# Altium PCB WCH_hairDrierCore_V1.5.PcbDoc (part 3 of 7)
Units mil, origin at the board's own origin, x right, y up, seen from the top; angles counter-clockwise.
Board outline 1683.54 x 992.13 mil, 4 copper layers (Top Layer, Mid-Layer 1, Mid-Layer 2, Bottom Layer); 84 components, 65 nets, 249 pads, 160 vias.
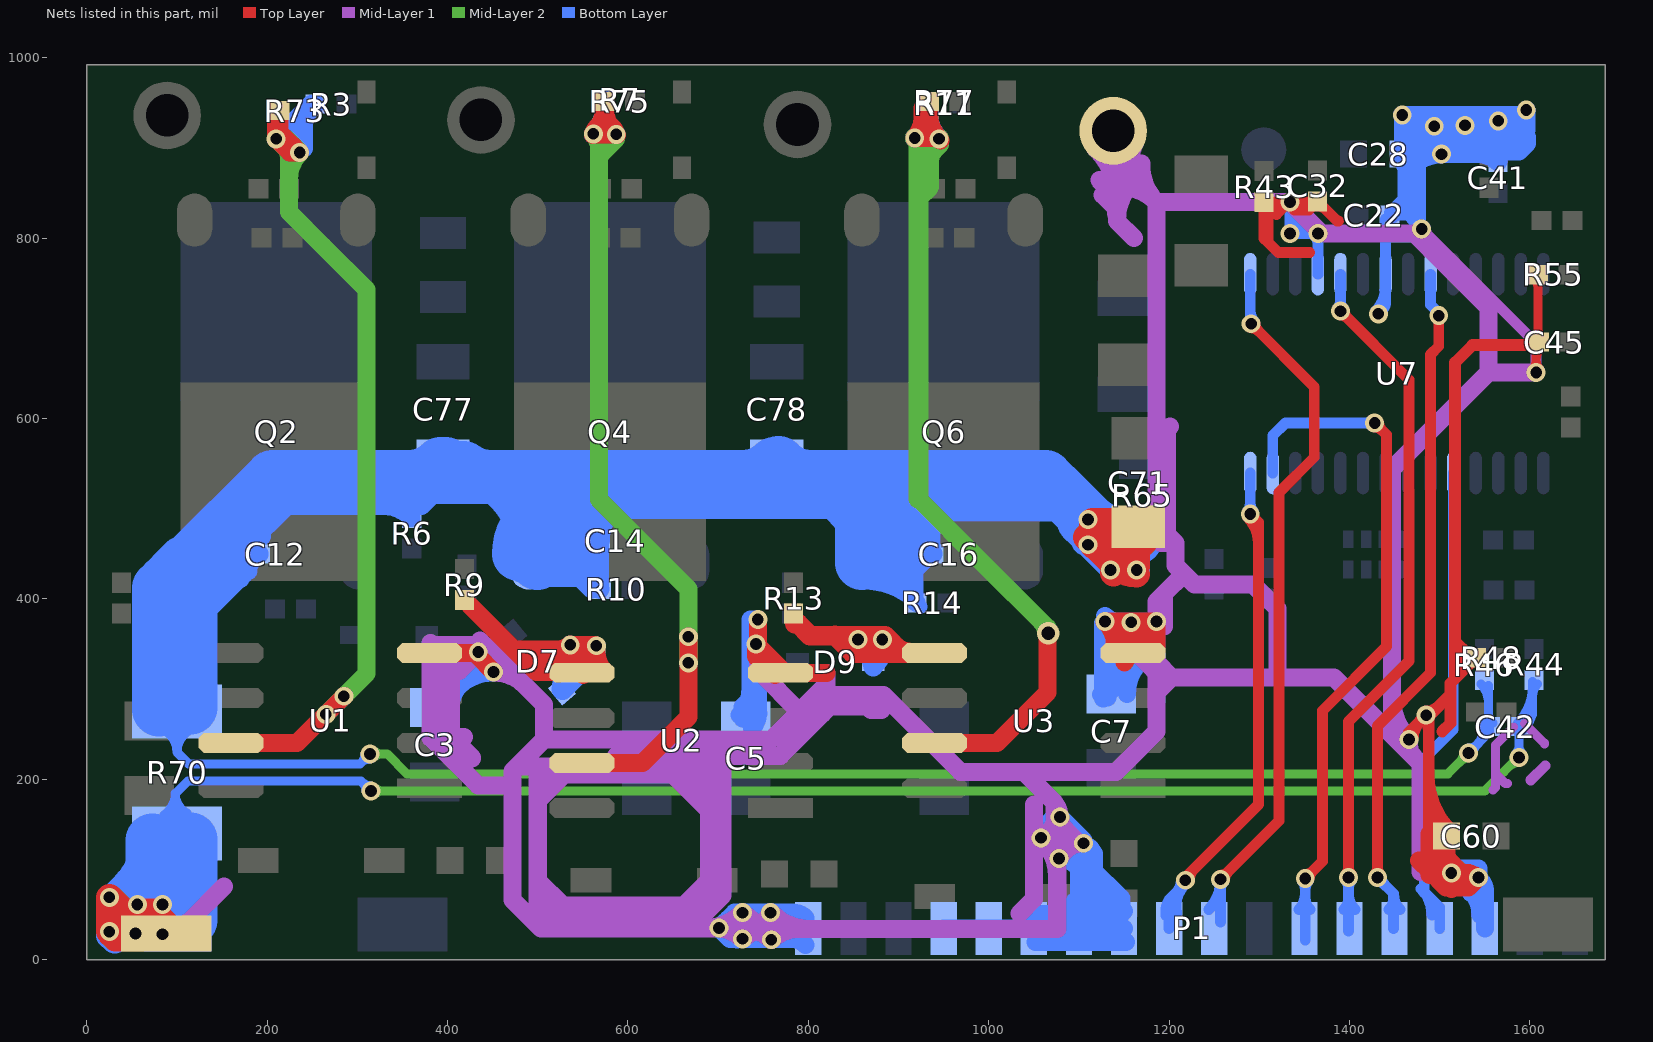
[diagram p5: the nets of this part, all layers, seen from the top]

## Via types
v1: diameter 21, hole 13, Top Layer to Bottom Layer, tented both sides, 155 vias
v2: diameter 25, hole 15, Top Layer to Bottom Layer, tented both sides, 5 vias

## Nets (pads, with @x,y where several pads share a name; then routed paths per layer and width w, separated by ;. In a path a pad name is that pad's centre, name@x,y a point inside that pad or via, vN(x,y) a via of type N, cw(c..) or ccw(c..) an arc to the next point about the centre after c; other vN are vias at no path point) (continued)
GND: (continued)
  Bottom Layer w20: C3.2@383.31,279.4 cw(c414.46,279.4) 392.43,301.43 ; C3.2@387,278 C3.2@399,290 ; C3.2@387,296 402,311 ; C3.2@391.65,291.06 ccw(c391.65,311.34) C3.2@406,297 ; C3.2@399,271.5 C3.2@399,290 ; 413.85,304.85 ccw(c439.29,279.4) 403.31,279.4 cw(c482.75,279.4) v1@426.57,335.57 ; 420,322 431,322 ; C5.2@724.98,272.07 ccw(c717.49,289) 736,289 736,377 v1(744,377) 744,362 ; C5.2@727,267.5 727,280 742,295 ; C5.2@734,264 744,274 744,362 ; 736,290.96 cw(c710.1,290.96) C5.2@728.41,272.64 ; 736,294.11 ccw(c766.37,294.11) C5.2@744.89,272.64 ; 736,301.3 cw(c693.2,301.3) 723.46,271.04 ccw(c673.89,320.61) 744,320.61 ; C5.2@737.61,256.89 ccw(c722.17,272.33) C5.2@744,272.33 ; C5.2@742,272.5 742,295 ; 742,305.44 cw(c695.61,305.44) C5.2@728.41,272.64 ; v1@742,348 v1(742,350) 742,321 742,295 ; 744,310.27 cw(c690.78,310.27) C5.2@728.41,272.64 ; v1@744,350 744,362 ; 782.65,52 v1(727,52) 718,52 v1(701,35) ; P1.18@788.43,23 v1(727,23) ; P1.15@950.04,34.61 1083,34.61 P1.12@1100.04,34.61 1100.04,115 ; P1.13@1047.04,50.61 1147.04,50.61 1147.04,68 1116.52,98.52 ; P1.13@1050.04,34.61 P1.11@1150.04,34.61 ; v1@1051,128 1051,136 1076,161 v1(1079,158) ; P1.13@1052.04,19.61 P1.11@1152.04,19.61 ; v1(1058,135) 1058,137 1069,148 ; 1088,129 1069,148 ; 1127,329.4 ccw(c1164.84,329.4) C7.2@1138.08,302.64 ; v1@1127,373 C7.2@1127,312 ; v1(1129,375) 1130,374 1144,374 ; v1@1129,381 ccw(c1148.59,400.59) v1@1157.83,374.47 ; v1@1132,372 1167,372 1167,358 ; C7.2@1133.41,302.64 ccw(c1110.27,325.79) 1143,325.79 ; 1134,50.61 1100,84.61 1100,102 ; v1@1136,374 1154,356 ; 1143,319.29 ccw(c1166.54,319.29) C7.2@1149.89,302.64 ; 1143,363.63 1143,328 ; 1143.22,344.22 1184.63,344.22 ; P1.11@1147.04,54.96 1100,102 ; C7.2@1148,311 1181.22,344.22 1184.63,344.22 ; C7.2@1153.31,294.4 cw(c1206.19,294.4) 1168.8,331.8 ; 1180,362 v1@1186,368 ; v1@1184.63,373.63 1184.63,344.22 ; v1@1185,374 v1(1158,374) 1144,374 ; v1(1186,375) v1@1186,368 ; v1(1458.5,936.5) 1554.5,936.5 ; v1@1459.5,936.5 C28.2@1459.5,893 ; 1461.5,918 1573,918 1554.5,936.5 ; v1@1520,96 1532,96 ; v1(1543,91) 1543,101 v1@1518,101 ; C41.2@1555.84,893 C28.2@1459.5,893 ; C41.2@1564.63,884.21 1564.63,899.63 1577,912 1586,912 ; 1564.63,896 1588,896 1597,905 1597,912 1586,912 ; v1(1565,930) 1584,930 v1(1596,942) ; 1593,917 1596,920 v1(1596,942) ; C3.2@399,290 431,322 ; 402,311 ccw(c414.85,298.15) 400.72,286.73 cw(c414.85,298.15) 402,311 ; 402,311 432,341 451,322 431,322 ; 410.88,301.88 cw(c451,261.77) v1@451,318.5 ; 410.88,301.88 cw(c451,261.77) v1@451,318.5 ; 410.88,301.88 cw(c451,261.77) v1@451,318.5 ; 419.5,310.5 cw(c441.95,288.06) v1@450.86,318.52 ; 419.5,310.5 cw(c441.95,288.06) v1@450.86,318.52 ; 419.5,310.5 cw(c441.95,288.06) v1@450.86,318.52 ; 421.83,312.83 ccw(c393.67,341) v1@433.5,341 ; 421.83,312.83 ccw(c393.67,341) v1@433.5,341 ; 421.83,312.83 ccw(c393.67,341) v1@433.5,341 ; v1(701,35) cw(c701,2.21) v1@726.61,22.69 ; v1(701,35) ccw(c701,62.56) v1@726.54,52.19 ; v1(701,35) cw(c701,2.21) v1@726.61,22.69 ; v1(701,35) ccw(c701,62.56) v1@726.54,52.19 ; v1(701,35) cw(c701,2.21) v1@726.61,22.69 ; v1(701,35) ccw(c701,62.56) v1@726.54,52.19 ; v1(701,35) 745.61,35 ; v1(701,35) 713,23 v1(727,23) ; v1@701.39,35.31 ccw(c727,55.79) v1(727,23) ; v1@701.39,35.31 ccw(c727,55.79) v1(727,23) ; v1@701.39,35.31 ccw(c727,55.79) v1(727,23) ; v1@708,28 ccw(c721.11,41.11) v1@726.85,23.48 ; v1@708,28 ccw(c721.11,41.11) v1@726.85,23.48 ; v1@708,28 ccw(c721.11,41.11) v1@726.85,23.48 ; 710.78,44.78 cw(c727,28.57) v1@727,51.5 ; 710.78,44.78 cw(c727,28.57) v1@727,51.5 ; 710.78,44.78 cw(c727,28.57) v1@727,51.5 ; 726.41,35 cw(c726.41,-10.59) v1@758.65,21.65 ; 726.41,35 cw(c726.41,-10.59) v1@758.65,21.65 ; 726.41,35 cw(c726.41,-10.59) v1@758.65,21.65 ; v1@727.35,22.65 cw(c756.23,-6.23) 756.23,34.61 ; v1@727.35,22.65 cw(c756.23,-6.23) 756.23,34.61 ; v1@727.35,22.65 cw(c756.23,-6.23) 756.23,34.61 ; v1@727.35,52.35 ccw(c770.19,95.19) 770.19,34.61 ; v1@727.35,52.35 ccw(c770.19,95.19) 770.19,34.61 ; v1@727.35,52.35 ccw(c770.19,95.19) 770.19,34.61 ; v1@727.46,22.81 cw(c745.61,15.4) 745.61,35 ; v1@727.46,22.81 cw(c745.61,15.4) 745.61,35 ; v1@727.46,22.81 cw(c745.61,15.4) 745.61,35 ; v1@727.5,52.03 ccw(c745.61,53.14) 745.61,35 ; v1@727.5,52.03 ccw(c745.61,53.14) 745.61,35 ; v1@727.5,52.03 ccw(c745.61,53.14) 745.61,35 ; 732,34.61 cw(c732,0.75) v1@758.61,21.69 ; 732,34.61 ccw(c732,61.94) v1@757.53,52.18 ; 732,34.61 cw(c732,0.75) v1@758.61,21.69 ; 732,34.61 ccw(c732,61.94) v1@757.53,52.18 ; 732,34.61 cw(c732,0.75) v1@758.61,21.69 ; 732,34.61 ccw(c732,61.94) v1@757.53,52.18 ; 732,34.61 P1.18@800.04,34.61 ; 742,295 cw(c717.62,295) 730.5,274.3 ccw(c717.62,295) 742,295 ; 742,295 cw(c718.1,295) 725.46,272.26 ccw(c718.1,295) 742,295 ; 742,295 ccw(c766.43,270.57) 731.98,267.89 cw(c766.43,270.57) 742,295 ; v1@758.36,52.35 ccw(c800.04,92.44) P1.18@800.04,34.61 ; v1@758.36,52.35 ccw(c800.04,92.44) P1.18@800.04,34.61 ; v1@758.36,52.35 ccw(c800.04,92.44) P1.18@800.04,34.61 ; v1@759.35,21.65 cw(c790.65,-9.65) P1.18@790.65,34.61 ; v1@759.35,21.65 cw(c790.65,-9.65) P1.18@790.65,34.61 ; v1@759.35,21.65 cw(c790.65,-9.65) P1.18@790.65,34.61 ; 780.92,23 cw(c780.92,0.53) P1.18@796.81,16.42 ; 780.92,23 cw(c780.92,0.53) P1.18@796.81,16.42 ; 780.92,23 cw(c780.92,0.53) P1.18@796.81,16.42 ; 783.14,52 cw(c783.14,32.67) P1.18@796.81,46.34 ; 783.14,52 cw(c783.14,32.67) P1.18@796.81,46.34 ; 783.14,52 cw(c783.14,32.67) P1.18@796.81,46.34 ; v1@1058,134.5 cw(c1058,111.57) 1074.22,127.78 ; v1@1058,134.5 cw(c1058,111.57) 1074.22,127.78 ; v1@1058,134.5 cw(c1058,111.57) 1074.22,127.78 ; v1@1058,134.5 cw(c1058,111.57) 1074.22,127.78 ; v1@1058,134.5 cw(c1058,111.57) 1074.22,127.78 ; v1@1058,134.5 cw(c1058,111.57) 1074.22,127.78 ; v1@1058.36,135.34 ccw(c1073,149.06) 1073,129 ; v1@1058.35,135.35 ccw(c1073.69,150.69) 1073.69,129 ; v1@1058.36,135.34 ccw(c1073,149.06) 1073,129 ; v1@1058.35,135.35 ccw(c1073.69,150.69) 1073.69,129 ; v1@1058.35,135.35 ccw(c1073.69,150.69) 1073.69,129 ; v1@1058.36,135.34 ccw(c1073,149.06) 1073,129 ; v1@1058.5,135 cw(c1079.02,135) 1064.51,149.51 ; v1@1058.5,135 cw(c1079.02,135) 1064.51,149.51 ; v1@1058.5,135 cw(c1079.02,135) 1064.51,149.51 ; 1067.9,152.9 cw(c1079,141.81) v1@1079,157.5 ; 1067.9,152.9 cw(c1079,141.81) v1@1079,157.5 ; 1067.9,152.9 cw(c1079,141.81) v1@1079,157.5 ; 1068.66,133.34 cw(c1047.32,112) v1@1077.5,112 ; 1068.66,133.34 cw(c1047.32,112) v1@1077.5,112 ; 1068.66,133.34 cw(c1047.32,112) v1@1077.5,112 ; 1069,148 v1(1079,158) ; 1073,129 1100,102 ; 1073,129 v1@1100.04,129 ; 1077.5,139.5 ccw(c1101.96,163.96) v1@1104.96,129.5 ; 1077.5,139.5 ccw(c1101.96,163.96) v1@1104.96,129.5 ; 1077.5,139.5 ccw(c1101.96,163.96) v1@1104.96,129.5 ; v1@1078,111.5 cw(c1078,81.32) 1099.34,102.66 ; v1@1078,111.5 cw(c1078,81.32) 1099.34,102.66 ; v1@1078,111.5 cw(c1078,81.32) 1099.34,102.66 ; v1@1078.49,111.89 cw(c1100.04,106.87) v1@1100.04,129 ; v1@1078.49,111.89 cw(c1100.04,106.87) v1@1100.04,129 ; v1@1078.49,111.89 cw(c1100.04,106.87) v1@1100.04,129 ; v1(1079,158) 1105,132 v1(1105,129) 1116.52,117.48 1116.52,98.52 ; 1095.32,64.26 cw(c1105.28,33.23) 1128.33,56.28 ; 1095.32,64.26 cw(c1105.28,33.23) 1128.33,56.28 ; 1095.32,64.26 cw(c1105.28,33.23) 1128.33,56.28 ; 1100.04,115 1116.52,98.52 ; 1100.04,115 v1@1100.04,129 ; 1100.04,115.82 cw(c1118.18,115.82) v1@1105.35,128.65 ; 1100.04,115.82 cw(c1118.18,115.82) v1@1105.35,128.65 ; 1100.04,115.82 cw(c1118.18,115.82) v1@1105.35,128.65 ; 1100.04,115.82 cw(c1118.18,115.82) v1@1105.35,128.65 ; 1100.04,115.82 cw(c1118.18,115.82) v1@1105.35,128.65 ; 1100.04,115.82 cw(c1118.18,115.82) v1@1105.35,128.65 ; 1100.04,115.82 cw(c1118.18,115.82) v1@1105.35,128.65 ; 1100.04,115.82 cw(c1118.18,115.82) v1@1105.35,128.65 ; 1100.04,115.82 cw(c1118.18,115.82) v1@1105.35,128.65 ; v1@1104.65,128.65 cw(c1075.98,99.98) 1116.52,99.98 ; v1@1104.65,128.65 cw(c1075.98,99.98) 1116.52,99.98 ; v1@1104.65,128.65 cw(c1075.98,99.98) 1116.52,99.98 ; v1@1104.85,128.52 cw(c1099.97,112.71) 1116.52,112.71 ; v1@1104.85,128.52 cw(c1099.97,112.71) 1116.52,112.71 ; v1@1104.85,128.52 cw(c1099.97,112.71) 1116.52,112.71 ; v1@1105.4,128.71 ccw(c1118.35,119.31) 1107.04,108 ; v1@1105.4,128.71 ccw(c1118.35,119.31) 1107.04,108 ; v1@1105.4,128.71 ccw(c1118.35,119.31) 1107.04,108 ; 1106.4,78.2 cw(c1082.79,54.59) 1114.86,45.26 ; 1106.4,78.2 cw(c1082.79,54.59) 1114.86,45.26 ; 1106.4,78.2 cw(c1082.79,54.59) 1114.86,45.26 ; 1116.64,67.97 ccw(c1150.04,101.37) P1.11@1150.04,54.14 ; 1116.64,67.97 ccw(c1150.04,101.37) P1.11@1150.04,54.14 ; 1116.64,67.97 ccw(c1150.04,101.37) P1.11@1150.04,54.14 ; C7.2@1127,312 1143,328 ; C7.2@1127,312 1127,289.5 1143,305.5 1143,328 ; v1@1128.65,374.65 cw(c1093.99,339.99) 1143,339.99 ; v1@1128.65,374.65 cw(c1093.99,339.99) 1143,339.99 ; v1@1128.65,374.65 cw(c1093.99,339.99) 1143,339.99 ; v1@1128.89,374.51 cw(c1125.03,356.96) 1143,356.96 ; v1@1128.89,374.51 cw(c1125.03,356.96) 1143,356.96 ; v1@1128.89,374.51 cw(c1125.03,356.96) 1143,356.96 ; v1@1129.01,374.5 cw(c1129.47,345.47) 1150,366 ; v1@1129,374.5 cw(c1129,344.32) 1150.34,365.66 ; v1@1129,374.5 cw(c1129,358.81) 1140.1,369.9 ; v1@1129.01,374.5 cw(c1129.47,345.47) 1150,366 ; v1@1129,374.5 cw(c1129,344.32) 1150.34,365.66 ; v1@1129,374.5 cw(c1129,358.81) 1140.1,369.9 ; v1@1129,374.5 cw(c1129,358.81) 1140.1,369.9 ; v1@1129,374.5 cw(c1129,344.32) 1150.34,365.66 ; v1@1129.01,374.5 cw(c1129.47,345.47) 1150,366 ; 1131.33,83.71 cw(c1097.19,49.57) P1.11@1145.47,49.57 ; 1131.33,83.71 cw(c1097.19,49.57) P1.11@1145.47,49.57 ; 1131.33,83.71 cw(c1097.19,49.57) P1.11@1145.47,49.57 ; P1.11@1140.55,61.45 cw(c1128.67,49.57) P1.11@1145.47,49.57 ; P1.11@1140.55,61.45 cw(c1128.67,49.57) P1.11@1145.47,49.57 ; P1.11@1140.55,61.45 cw(c1128.67,49.57) P1.11@1145.47,49.57 ; 1143,328 cw(c1102.21,328) 1124.29,293.7 ccw(c1102.21,328) 1143,328 ; 1143,328 ccw(c1171.97,299.03) 1131.89,290.54 cw(c1171.97,299.03) 1143,328 ; 1143,328 1167,352 1167,358 ; 1143,336.58 cw(c1195.42,336.58) v1@1158.35,373.65 ; 1143,336.58 cw(c1195.42,336.58) v1@1158.35,373.65 ; 1143,336.58 cw(c1195.42,336.58) v1@1158.35,373.65 ; 1143,355.76 cw(c1160.98,355.76) v1@1158.08,373.51 ; 1143,355.76 cw(c1160.98,355.76) v1@1158.08,373.51 ; 1143,355.76 cw(c1160.98,355.76) v1@1158.08,373.51 ; 1144,374 1144,372 1167,349 ; v1@1157.65,373.65 cw(c1135.07,351.07) 1167,351.07 ; v1@1157.65,373.65 cw(c1135.07,351.07) 1167,351.07 ; v1@1157.65,373.65 cw(c1135.07,351.07) 1167,351.07 ; v1@1157.65,373.65 cw(c1135.07,351.07) 1167,351.07 ; v1@1157.65,373.65 cw(c1135.07,351.07) 1167,351.07 ; v1@1157.65,373.65 cw(c1135.07,351.07) 1167,351.07 ; v1@1157.71,373.59 cw(c1145.01,355.64) 1167,355.64 ; v1@1157.71,373.59 cw(c1145.01,355.64) 1167,355.64 ; v1@1157.71,373.59 cw(c1145.01,355.64) 1167,355.64 ; v1@1157.71,373.59 cw(c1145.01,355.64) 1167,355.64 ; v1@1157.71,373.59 cw(c1145.01,355.64) 1167,355.64 ; v1@1157.71,373.59 cw(c1145.01,355.64) 1167,355.64 ; v1@1157.71,373.59 cw(c1145.01,355.64) 1167,355.64 ; v1@1157.71,373.59 cw(c1145.01,355.64) 1167,355.64 ; v1@1157.71,373.59 cw(c1145.01,355.64) 1167,355.64 ; v1@1158.38,373.67 ccw(c1167.67,365.67) 1159,357 ; v1@1158.38,373.67 ccw(c1167.67,365.67) 1159,357 ; v1@1158.38,373.67 ccw(c1167.67,365.67) 1159,357 ; 1167,349 v1@1186,368 ; 1167,349 1167,358 ; 1167,349.51 cw(c1192.92,349.51) v1@1186.13,374.52 ; 1167,349.51 cw(c1192.92,349.51) v1@1186.13,374.52 ; 1167,349.51 cw(c1192.92,349.51) v1@1186.13,374.52 ; 1180.2,362.2 ccw(c1167.39,375) v1@1185.5,375 ; 1180.2,362.2 ccw(c1167.39,375) v1@1185.5,375 ; 1180.2,362.2 ccw(c1167.39,375) v1@1185.5,375 ; C28.2@1459.5,893 1478.5,912 1586,912 ; v1@1513,95.5 cw(c1513,67.74) 1532.63,87.37 ; v1@1513.01,95.5 cw(c1514.09,51.09) v1@1545.5,82.5 ; v1@1513,95.5 cw(c1513,67.74) 1532.63,87.37 ; v1@1513.01,95.5 cw(c1514.09,51.09) v1@1545.5,82.5 ; v1@1513,95.5 cw(c1513,67.74) 1532.63,87.37 ; v1@1513.01,95.5 cw(c1514.09,51.09) v1@1545.5,82.5 ; v1@1513.1,95.51 cw(c1516.59,77.59) 1529.5,90.5 ; v1@1513.09,95.51 cw(c1518.61,63.61) v1@1541.5,86.5 ; v1@1513.1,95.51 cw(c1516.59,77.59) 1529.5,90.5 ; v1@1513.09,95.51 cw(c1518.61,63.61) v1@1541.5,86.5 ; v1@1513.1,95.51 cw(c1516.59,77.59) 1529.5,90.5 ; v1@1513.09,95.51 cw(c1518.61,63.61) v1@1541.5,86.5 ; v1@1513.35,95.65 cw(c1526.28,82.72) 1526.28,101 ; v1@1513.35,95.65 cw(c1526.28,82.72) 1526.28,101 ; v1@1513.35,95.65 cw(c1526.28,82.72) 1526.28,101 ; v1@1518,101 cw(c1518,66.49) v1@1542.64,90.65 ; v1@1518,101 cw(c1518,66.49) v1@1542.64,90.65 ; v1@1518,101 cw(c1518,66.49) v1@1542.64,90.65 ; v1@1518,101 v1(1513,96) 1524,96 1535,85 1535,76 1550.04,60.96 P1.3@1550.04,34.61 1550.04,77.96 1536,92 1532,96 ; 1529.72,96 cw(c1529.72,77.72) v1@1542.65,90.65 ; 1529.72,96 cw(c1529.72,77.72) v1@1542.65,90.65 ; 1529.72,96 cw(c1529.72,77.72) v1@1542.65,90.65 ; 1529.72,96 cw(c1529.72,77.72) v1@1542.65,90.65 ; 1529.72,96 cw(c1529.72,77.72) v1@1542.65,90.65 ; 1529.72,96 cw(c1529.72,77.72) v1@1542.65,90.65 ; 1529.72,96 cw(c1529.72,77.72) v1@1542.65,90.65 ; 1529.72,96 cw(c1529.72,77.72) v1@1542.65,90.65 ; 1529.72,96 cw(c1529.72,77.72) v1@1542.65,90.65 ; 1532,96 cw(c1532,82.75) v1@1542.6,90.7 ; 1532,96 cw(c1532,82.75) v1@1542.6,90.7 ; 1532,96 cw(c1532,82.75) v1@1542.6,90.7 ; 1534.19,76.81 cw(c1506.94,49.57) P1.3@1545.47,49.57 ; 1534.19,76.81 cw(c1506.94,49.57) P1.3@1545.47,49.57 ; 1534.19,76.81 cw(c1506.94,49.57) P1.3@1545.47,49.57 ; 1535,74 cw(c1555.75,74) v1@1543.3,90.6 ; 1535,74 cw(c1555.75,74) v1@1543.3,90.6 ; 1535,74 cw(c1555.75,74) v1@1543.3,90.6 ; v1@1542.65,90.65 cw(c1524.8,72.8) 1550.04,72.8 ; v1@1542.65,90.65 cw(c1524.8,72.8) 1550.04,72.8 ; v1@1542.65,90.65 cw(c1524.8,72.8) 1550.04,72.8 ; v1@1542.71,90.6 cw(c1532.21,76.18) 1550.04,76.18 ; v1@1542.71,90.6 cw(c1532.21,76.18) 1550.04,76.18 ; v1@1542.71,90.6 cw(c1532.21,76.18) 1550.04,76.18 ; 1543.12,893 cw(c1543.12,863.21) C41.2@1564.18,884.27 ; 1543.12,893 cw(c1543.12,863.21) C41.2@1564.18,884.27 ; 1543.12,893 cw(c1543.12,863.21) C41.2@1564.18,884.27 ; 1554.5,936.5 1590.5,936.5 v1(1596,942) ; 1562,897 cw(c1597,862.01) 1597,911.5 ; 1562,897 cw(c1597,862.01) 1597,911.5 ; 1562,897 cw(c1597,862.01) 1597,911.5 ; C41.2@1565.26,884.72 cw(c1602.78,884.72) 1576.25,911.25 ; C41.2@1565.26,884.72 cw(c1602.78,884.72) 1576.25,911.25 ; C41.2@1565.26,884.72 cw(c1602.78,884.72) 1576.25,911.25 ; 1567,902 cw(c1591.14,877.86) 1596.92,911.51 ; 1567,902 cw(c1591.14,877.86) 1596.92,911.51 ; 1567,902 cw(c1591.14,877.86) 1596.92,911.51 ; 736,334.31 cw(c757.69,334.31) 742.35,349.65 ccw(c757.69,334.31) 736,334.31 ; v1@736,356.48 cw(c764.52,356.48) 744.35,376.65 ccw(c764.52,356.48) v1@736,356.48 ; 736,365.69 ccw(c757.69,365.69) 742.35,350.35 cw(c757.69,365.69) 736,365.69
  Bottom Layer w30: v1@25,26.5 ccw(c25,51.85) pad.0@42.92,33.92 ; v1@31,24.93 cw(c77.48,24.93) pad.0@53.7,64.87 ; 34.37,25.37 cw(c54,5.74) pad.0@54,33.5 ; 41,81 ccw(c-16.95,138.95) R70.1@65,139.84 ; pad.0@48,39 31,22 31,35 v1@31,71 ; pad.0@50.96,25.68 cw(c92.42,71) v1@31,71 ; pad.0@51.5,61 cw(c125.13,61) R70.1@73.07,113.07 ; pad.0@53.78,44.78 ccw(c37.57,61) pad.0@60.5,61 ; pad.0@55,46 ccw(c41.53,59.47) pad.0@60.48,61.47 ; R70.1@100,140 v1@31,71
  Bottom Layer w60: pad.0@64,63 64,70 ; pad.0@73,43 R70.1@73,132 ; pad.0@115,44 R70.1@115,133
  other v1: 84,28 54,29 758,52 56,61 84,61 1432,716 1502,893 1494,924 1528,925
I1_SHUNT: C12.2 C14.2 C16.2 C42.2 C71.2 C77.1 C78.1 Q2.3 Q4.3 Q6.3 R6.1 R10.1 R14.1 R46.1 R65.1 R70.2 | length 11126.5
  Top Layer w10: C71.2@1157.5,488 C71.2@1165.72,479.77
  Top Layer w20: v1(1110,460) v1(1110,488)
  Top Layer w30: v1@1108.72,468.28 ccw(c1144.05,503.61) C71.2@1171.62,461.94 ; v1@1114.95,486 C71.2@1161,486 ; v1@1117,460 1143,434 C71.2@1143,480.05 ; C71.2@1162,459 v1@1115.95,459 ; v1@1164,436 C71.2@1164,478.05 ; v1@1115.95,459 ccw(c1115.95,497.8) C71.2@1151.84,483.05 ; v1@1115.95,459 ccw(c1115.95,497.8) C71.2@1151.84,483.05 ; v1@1115.95,459 ccw(c1115.95,497.8) C71.2@1151.84,483.05 ; 1123.97,486 cw(c1123.97,443.92) C71.2@1153.72,473.68 ; 1123.97,486 cw(c1123.97,443.92) C71.2@1153.72,473.68 ; 1123.97,486 cw(c1123.97,443.92) C71.2@1153.72,473.68 ; v1@1139.25,437.75 ccw(c1164,462.51) v1@1164,427.5 ; v1@1139.25,437.75 ccw(c1164,462.51) v1@1164,427.5 ; v1@1139.25,437.75 ccw(c1164,462.51) v1@1164,427.5 ; v1@1143,431.01 cw(c1193.83,431.01) C71.2@1164.75,472.7 ; v1@1143,431.01 cw(c1193.83,431.01) C71.2@1164.75,472.7 ; v1@1143,431.01 cw(c1193.83,431.01) C71.2@1164.75,472.7 ; C71.2@1143,471.83 ccw(c1203.83,471.83) v1@1160.82,428.82 ; C71.2@1143,471.83 ccw(c1203.83,471.83) v1@1160.82,428.82 ; C71.2@1143,471.83 ccw(c1203.83,471.83) v1@1160.82,428.82 ; 1164,454.79 cw(c1190.7,454.79) C71.2@1171.82,473.68 ; 1164,454.79 cw(c1190.7,454.79) C71.2@1171.82,473.68 ; 1164,454.79 cw(c1190.7,454.79) C71.2@1171.82,473.68 ; v1@1138.18,428.82 ccw(c1126.55,440.45) 1143,440.45 cw(c1126.55,440.45) v1@1138.18,428.82
  Mid-Layer 2 w10: v1(314,228) 333,228 355,206 598,206 824,206 1509,206 v1(1532,229) ; v1@317.89,224.11 cw(c327.28,214.72) 327.28,228 ; v1@317.89,224.11 cw(c327.28,214.72) 327.28,228 ; v1@317.89,224.11 cw(c327.28,214.72) 327.28,228 ; v1@317.89,231.89 ccw(c327.28,241.28) 327.28,228 ; v1@317.89,231.89 ccw(c327.28,241.28) 327.28,228 ; v1@317.89,231.89 ccw(c327.28,241.28) 327.28,228 ; 1522.61,219.61 cw(c1532,210.22) v1@1532,223.5 ; 1522.61,219.61 ccw(c1513.22,229) v1@1526.5,229 ; 1522.61,219.61 cw(c1532,210.22) v1@1532,223.5 ; 1522.61,219.61 ccw(c1513.22,229) v1@1526.5,229 ; 1522.61,219.61 ccw(c1513.22,229) v1@1526.5,229 ; 1522.61,219.61 cw(c1532,210.22) v1@1532,223.5
  Bottom Layer w10: R70.2@100,275 100,230 ; v1@315,223 309,223 303,217 113,217 100,230 ; v1(1532,229) 1555.52,252.52 C42.2@1555.52,258.36 ; C42.2@1554,258.12 R46.1@1554,304 ; R70.2@86.79,253.77 cw(c72,230) 100,230 ; R70.2@86.79,253.77 cw(c72,230) 100,230 ; R70.2@86.79,253.77 cw(c72,230) 100,230 ; 100,230 cw(c128,230) R70.2@113.21,253.77 ; 100,230 cw(c128,230) R70.2@113.21,253.77 ; 100,230 cw(c128,230) R70.2@113.21,253.77 ; 304.61,218.61 cw(c314,209.22) v1@314,222.5 ; 304.61,218.61 ccw(c295.22,228) v1@308.5,228 ; 304.61,218.61 cw(c314,209.22) v1@314,222.5 ; 304.61,218.61 ccw(c295.22,228) v1@308.5,228 ; 304.61,218.61 ccw(c295.22,228) v1@308.5,228 ; 304.61,218.61 cw(c314,209.22) v1@314,222.5 ; v1@1532,234.5 ccw(c1532,247.78) 1541.39,238.39 ; v1@1532,234.5 ccw(c1532,247.78) 1541.39,238.39 ; v1@1532,234.5 ccw(c1532,247.78) 1541.39,238.39 ; v1@1537.5,229 cw(c1550.78,229) 1541.39,238.39 ; v1@1537.5,229 cw(c1550.78,229) 1541.39,238.39 ; v1@1537.5,229 cw(c1550.78,229) 1541.39,238.39 ; 1540.91,237.91 ccw(c1520.46,258.36) C42.2@1549.38,258.36 ; 1540.91,237.91 ccw(c1520.46,258.36) C42.2@1549.38,258.36 ; 1540.91,237.91 ccw(c1520.46,258.36) C42.2@1549.38,258.36 ; R46.1@1545.65,305.65 cw(c1525.49,285.49) 1554,285.49 ; R46.1@1545.65,305.65 cw(c1525.49,285.49) 1554,285.49 ; R46.1@1545.65,305.65 cw(c1525.49,285.49) 1554,285.49 ; C42.2@1551.03,262.34 ccw(c1543.87,269.51) 1554,269.51 ; C42.2@1551.03,262.34 ccw(c1543.87,269.51) 1554,269.51 ; C42.2@1551.03,262.34 ccw(c1543.87,269.51) 1554,269.51 ; 1554,274.4 ccw(c1571.05,274.4) C42.2@1558.99,262.34 ; 1554,274.4 ccw(c1571.05,274.4) C42.2@1558.99,262.34 ; 1554,274.4 ccw(c1571.05,274.4) C42.2@1558.99,262.34
  Bottom Layer w15: Q6.3@875.51,440 R14.1@920.14,395.37 920.14,430.98 C16.2@938.78,449.63 938.78,488.23 ; Q6.3@859.45,417.97 cw(c859.45,326.03) 924.46,391.04 ccw(c859.45,326.03) Q6.3@859.45,417.97 ; Q6.3@859.45,432.97 cw(c859.45,377.24) 898.86,416.65 ccw(c859.45,377.24) Q6.3@859.45,432.97
  Bottom Layer w20: 115,381 128,381 174,427 152.45,427 ; Q2.3@126.3,446.85 ccw(c154.01,474.56) 154.01,435.37 ; Q2.3@127.74,445.01 ccw(c144.82,455.32) 144.82,435.37 179,435.37 179,488 169,498 ; 147.81,435.05 ccw(c170.58,448.4) 170.58,422 166,422 cw(c166,440.99) 148.42,433.82 ; 155.33,435.37 ccw(c155.33,485.58) C12.2@190.83,450.08 ; 179,430.81 cw(c198.54,430.81) C12.2@191.51,449.04 ; 179,459.96 cw(c187.29,459.96) 184.31,467.7 ; 179,480.8 ccw(c222.45,480.8) C12.2@191.73,450.08 ; 194,501 194,469 194,475 206,487 222,503 371,503 387,519 397,529 403,535 ; 328.36,503 cw(c328.36,458.36) R6.1@359.92,489.92 ; Q4.3@496.3,437.01 ccw(c530.11,470.82) 530.11,423 ; Q4.3@496.3,442.99 cw(c513.21,426.08) 513.21,450 ; Q4.3@496.3,456.69 ccw(c512.45,472.84) 512.45,450 ; Q4.3@498.48,433.64 ccw(c514,439.63) 514,423 547,423 ; 509.45,450 569,450 ; 531.44,450 ccw(c531.44,501.47) C14.2@567.83,465.08 ; 552,418 ccw(c568.92,434.92) R10.1@569.61,411 ; R10.1@559.63,410.37 547,423 ; 565,517.5 565,481 ; 567.41,435.37 534.01,435.37 ; C14.2@568.47,465.23 cw(c577.14,492) 549,492 549,464.63 ; R10.1@568.78,411.72 568.78,423 ; 568.78,477.21 C14.2@568.78,464.63 568.78,423 ; R10.1@569.08,410.06 ccw(c547,397.69) 547,423 ; C14.2@569.92,464.63 cw(c621.32,464.63) 584.97,500.97 ; 587,518.5 587,503 565,481 ; Q6.3@859.45,440 859.45,442.95 891.25,474.75 ; Q6.3@866.3,446.85 ccw(c894.01,474.56) 894.01,435.37 ; Q6.3@869.08,449.63 908,449.63 ; 880.45,419 908,419 ; 891.25,436.12 891.25,457 ; 900.75,451.88 900.75,484.25 ; 912.88,435.37 891.25,457 ; 913,496.5 913,449.63 ; R14.1@920.14,395.37 908,407.5 908,419 ; 926,487 926,468 ; 932,515.5 914.75,498.25 900.75,484.25 ; 947,515.5 926,494.5 926,468 ; 524.08,464.63 ccw(c524.08,449.69) 509.13,449.78 cw(c524.08,449.69) 524.08,464.63 ; 524.08,464.63 549,464.63 ; 534.01,435.37 cw(c534.01,474.56) 506.3,446.85 ccw(c534.01,474.56) 534.01,435.37 ; 547,423 568.78,423 ; 549,464.63 ccw(c549,411.92) 507.14,443.96 cw(c549,411.92) 549,464.63 ; 549,464.63 565,464.63 565,481 ; Q6.3@859.45,459.53 ccw(c859.45,499.55) 887.75,471.25 ; Q6.3@859.45,459.53 ccw(c859.45,499.55) 887.75,471.25 ; Q6.3@859.45,459.53 ccw(c859.45,499.55) 887.75,471.25 ; 891.25,457 891.25,474.75 ; 891.25,474.75 900.75,484.25 ; 908,419 ccw(c936.27,419) 919.99,395.89 cw(c936.27,419) 908,419 ; 908,419 cw(c908,476.28) 866.47,436.83 ccw(c908,476.28) 908,419 ; 908,419 908,449.63 ; 908,449.63 913,449.63 ; 913,449.63 926,449.63 ; 926,449.63 926,468 ; 926,449.63 C16.2@938.78,449.63 926,462.41 926,468 ; 926,468 ccw(c944.89,468) C16.2@938.49,450.22 ; 926,468 ccw(c944.89,468) C16.2@938.49,450.22 ; 926,468 ccw(c944.89,468) C16.2@938.49,450.22 ; 926,468 ccw(c944.89,468) C16.2@938.49,450.22 ; 926,468 ccw(c944.89,468) C16.2@938.49,450.22 ; 926,468 ccw(c944.89,468) C16.2@938.49,450.22 ; 926,468 ccw(c944.89,468) C16.2@938.49,450.22 ; 926,468 ccw(c944.89,468) C16.2@938.49,450.22 ; 926,480.8 ccw(c969.45,480.8) C16.2@938.73,450.08 ; 926,480.8 ccw(c969.45,480.8) C16.2@938.73,450.08 ; 926,480.8 ccw(c969.45,480.8) C16.2@938.73,450.08 ; 926,480.8 ccw(c969.45,480.8) C16.2@938.73,450.08 ; 146.3,437.01 ccw(c170.45,461.16) 170.45,427 cw(c170.45,461.16) 146.3,437.01 ; 146.3,446.85 ccw(c174.01,474.56) 174.01,435.37 cw(c174.01,474.56) 146.3,446.85 ; Q4.3@506.3,442.99 cw(c523.21,426.08) 523.21,450 ccw(c523.21,426.08) Q4.3@506.3,442.99 ; Q4.3@506.3,456.69 ccw(c522.45,472.84) 522.45,450 cw(c522.45,472.84) Q4.3@506.3,456.69 ; Q6.3@866.3,442.99 cw(c882.32,426.97) 882.32,449.63 ccw(c882.32,426.97) Q6.3@866.3,442.99 ; Q6.3@866.3,456.69 ccw(c883.34,473.74) 883.34,449.63 cw(c883.34,473.74) Q6.3@866.3,456.69
  Bottom Layer w30: 925.73,475.17 945,494.44 ; v1@1117,481 1118.43,479.57 R65.1@1170,479.57 ; v1(1164,432) R65.1@1164,473.57 ; v1@1106.82,463.18 cw(c1146.37,423.63) 1146.37,479.57 ccw(c1146.37,423.63) v1@1106.82,463.18 ; v1@1106.82,484.82 ccw(c1119.5,497.5) 1119.5,479.57 cw(c1119.5,497.5) v1@1106.82,484.82
  Bottom Layer w60: R70.2@80,277.55 80,412 Q2.3@108,440 ; 80,359.82 cw(c189.78,359.82) Q2.3@112.16,437.45 ; 80,386.73 cw(c137.25,386.73) Q2.3@115.54,439.7 ; R70.2@115,279.55 Q2.3@115,414 ; Q2.3@119.45,439.53 ccw(c119.45,486.67) 152.78,453.34 ; 154.5,455.05 139.45,440 Q2.3@108,440 ; 357.31,535 ccw(c357.31,584.7) C77.1@392.45,549.56 ; C77.1@397.55,549.56 ccw(c432.69,584.7) 432.69,535 ; C77.1@417.76,545.03 ccw(c447.69,584.7) 447.69,535 ; 469.79,522.21 cw(c397.42,449.84) Q4.3@499.76,449.84 ; Q4.3@489.87,446.02 cw(c529.99,462.01) 499.45,492.55 ; Q4.3@499.45,440 499.45,492.55 ; 512.04,505.14 ccw(c567.34,449.84) Q4.3@489.13,449.84 ; 521.08,492.55 499.45,492.55 ; 553,535 510.55,492.55 499.45,492.55 ; 687.47,518.5 ccw(c687.47,624.53) 762.45,549.56 cw(c727.31,584.7) 727.31,535 ; 692.47,518.5 ccw(c692.47,624.53) C78.1@757.78,541 ; C78.1@766.73,550.48 ccw(c832.5,602.12) 832.5,518.5 ; Q6.3@859.45,440 859.45,491.55 832.5,518.5 ; 883.4,515.5 945,515.5 1082.5,515.5 ; 1146,447 1117,476 1117,481 1082.5,515.5 ; Q2.3@108,440 111,440 206,535 457,535 ; 457,535 499.45,492.55 ; 457,535 789,535 ; Q4.3@489.13,449.84 cw(c540.54,449.84) 504.19,486.19 ccw(c540.54,449.84) Q4.3@489.13,449.84 ; 499.45,492.55 525.4,518.5 832.5,518.5 ; 789,535 1063,535 1082.5,515.5 ; 789,535 816,535 832.5,518.5 ; 847.57,503.43 cw(c793.97,449.84) Q6.3@869.76,449.84 ; 847.57,503.43 cw(c793.97,449.84) Q6.3@869.76,449.84 ; 847.57,503.43 cw(c793.97,449.84) Q6.3@869.76,449.84 ; 86.57,418.57 cw(c139.45,365.69) 139.45,440.47 ccw(c139.45,365.69) 86.57,418.57 ; Q2.3@103.37,435.37 cw(c139.45,399.29) 139.45,450.32 ccw(c139.45,399.29) Q2.3@103.37,435.37 ; 115,396.03 cw(c173.57,396.03) 132.16,437.45 ccw(c173.57,396.03) 115,396.03 ; 115,400.85 cw(c162.76,400.85) 133.03,438.23 ccw(c162.76,400.85) 115,400.85 ; Q4.3@479.13,449.84 cw(c533.2,449.84) 494.97,488.07 ccw(c533.2,449.84) Q4.3@479.13,449.84 ; 486.86,505.14 cw(c431.56,449.84) 509.76,449.84 ccw(c431.56,449.84) 486.86,505.14 ; C78.1@767.55,549.56 ccw(c802.69,584.7) 802.69,535 cw(c802.69,584.7) C78.1@767.55,549.56 ; v1@1105.21,487.79 ccw(c1155.59,538.16) 1163.49,467.36 cw(c1155.59,538.16) v1@1105.21,487.79 ; v1@1108.51,489.49 ccw(c1162.13,543.11) 1162.13,467.28 cw(c1162.13,543.11) v1@1108.51,489.49
  other v1: 1135,432
KEY1: P1.9 U7.1 | length 1078.5
  Top Layer w12: v1(1257,89) 1322,154 1322,323 1322,518 1361,557 1361,635 v1(1291,705) ; v1@1257,93.5 ccw(c1257,104.36) 1264.68,96.68 ; v1@1257,93.5 ccw(c1257,104.36) 1264.68,96.68 ; v1@1257,93.5 ccw(c1257,104.36) 1264.68,96.68 ; v1@1261.5,89 cw(c1272.36,89) 1264.68,96.68 ; v1@1261.5,89 cw(c1272.36,89) 1264.68,96.68 ; v1@1261.5,89 cw(c1272.36,89) 1264.68,96.68 ; v1@1291,700.5 cw(c1291,689.64) 1298.68,697.32 ; v1@1291,700.5 cw(c1291,689.64) 1298.68,697.32 ; v1@1291,700.5 cw(c1291,689.64) 1298.68,697.32 ; v1@1295.5,705 ccw(c1306.36,705) 1298.68,697.32 ; v1@1295.5,705 ccw(c1306.36,705) 1298.68,697.32 ; v1@1295.5,705 ccw(c1306.36,705) 1298.68,697.32
  Bottom Layer w12: P1.9@1257,41.57 v1(1257,89) ; v1@1290,709 U7.1@1290,760 ; P1.9@1243.98,55.63 ccw(c1212.55,87.06) v1@1257,87.06 ; P1.9@1243.98,55.63 ccw(c1212.55,87.06) v1@1257,87.06 ; P1.9@1243.98,55.63 ccw(c1212.55,87.06) v1@1257,87.06 ; v1@1253.82,85.82 cw(c1246.14,78.14) 1257,78.14 ; v1@1253.82,85.82 cw(c1246.14,78.14) 1257,78.14 ; v1@1253.82,85.82 cw(c1246.14,78.14) 1257,78.14 ; 1257,78.14 cw(c1267.86,78.14) v1@1260.18,85.82 ; 1257,78.14 cw(c1267.86,78.14) v1@1260.18,85.82 ; 1257,78.14 cw(c1267.86,78.14) v1@1260.18,85.82 ; 1290,718.28 ccw(c1304.28,718.28) v1@1294.18,708.18 ; 1290,718.28 ccw(c1304.28,718.28) v1@1294.18,708.18 ; 1290,718.28 ccw(c1304.28,718.28) v1@1294.18,708.18
KEY2: P1.10 U7.28 | length 959.2
  Top Layer w12: v1@1216.5,89.5 1299,172 1299,338 1299,485 v1(1290,494) ; v1@1222.5,88 cw(c1240.61,88) 1227.8,100.8 ; v1@1222.5,88 cw(c1240.61,88) 1227.8,100.8 ; v1@1222.5,88 cw(c1240.61,88) 1227.8,100.8 ; v1@1286.82,490.82 cw(c1257.41,461.41) 1299,461.41 ; v1@1286.82,490.82 cw(c1257.41,461.41) 1299,461.41 ; v1@1286.82,490.82 cw(c1257.41,461.41) 1299,461.41
  Bottom Layer w12: P1.10@1200.04,34.61 1200.04,66.04 v1@1218,84 ; v1(1218,88) v1@1218,84 ; v1(1290,494) U7.28@1290,539.53 ; P1.10@1196.68,48.84 cw(c1217.53,53.36) 1202.45,68.45 ; P1.10@1196.68,48.84 cw(c1217.53,53.36) 1202.45,68.45 ; P1.10@1196.68,48.84 cw(c1217.53,53.36) 1202.45,68.45 ; 1207.49,73.49 ccw(c1192.98,88) v1@1213.5,88 ; 1207.49,73.49 ccw(c1192.98,88) v1@1213.5,88 ; 1207.49,73.49 ccw(c1192.98,88) v1@1213.5,88 ; P1.10@1208.41,51.38 cw(c1243.09,58.91) v1@1218,84 ; P1.10@1208.41,51.38 cw(c1243.09,58.91) v1@1218,84 ; P1.10@1208.41,51.38 cw(c1243.09,58.91) v1@1218,84 ; v1@1286.82,497.18 ccw(c1279.14,504.86) 1290,504.86 ; v1@1286.82,497.18 ccw(c1279.14,504.86) 1290,504.86 ; v1@1286.82,497.18 ccw(c1279.14,504.86) 1290,504.86 ; 1290,504.86 ccw(c1300.86,504.86) v1@1293.18,497.18 ; 1290,504.86 ccw(c1300.86,504.86) v1@1293.18,497.18 ; 1290,504.86 ccw(c1300.86,504.86) v1@1293.18,497.18
KEY3: P1.4 U7.19 | length 621.7
  Bottom Layer w12: P1.4@1500.04,34.61 1500.04,57.96 1483,75 1483,223 1515,255 1515,487 U7.19@1515,539.53 ; 1479.48,78.52 cw(c1450.53,49.57) P1.4@1491.47,49.57 ; 1479.48,78.52 cw(c1450.53,49.57) P1.4@1491.47,49.57 ; 1479.48,78.52 cw(c1450.53,49.57) P1.4@1491.47,49.57
LED1: P1.6 U7.5 | length 1086.9
  Top Layer w12: v1(1390,719) 1466,643 1466,331 1399,264 v1@1399,94 ; v1@1390,714.5 cw(c1390,703.64) 1397.68,711.32 ; v1@1390,714.5 cw(c1390,703.64) 1397.68,711.32 ; v1@1390,714.5 cw(c1390,703.64) 1397.68,711.32 ; v1@1394.5,719 ccw(c1405.36,719) 1397.68,711.32 ; v1@1394.5,719 ccw(c1405.36,719) 1397.68,711.32 ; v1@1394.5,719 ccw(c1405.36,719) 1397.68,711.32 ; v1@1395.82,94.18 ccw(c1388.14,101.86) 1399,101.86 ; v1@1395.82,94.18 ccw(c1388.14,101.86) 1399,101.86 ; v1@1395.82,94.18 ccw(c1388.14,101.86) 1399,101.86 ; 1399,101.86 ccw(c1409.86,101.86) v1@1402.18,94.18 ; 1399,101.86 ccw(c1409.86,101.86) v1@1402.18,94.18 ; 1399,101.86 ccw(c1409.86,101.86) v1@1402.18,94.18
  Bottom Layer w12: v1(1390,719) U7.5@1390,760 ; P1.6@1399,31.57 v1(1399,91) ; v1@1386.82,722.18 ccw(c1379.14,729.86) 1390,729.86 ; v1@1386.82,722.18 ccw(c1379.14,729.86) 1390,729.86 ; v1@1386.82,722.18 ccw(c1379.14,729.86) 1390,729.86 ; 1390,729.86 ccw(c1400.86,729.86) v1@1393.18,722.18 ; 1390,729.86 ccw(c1400.86,729.86) v1@1393.18,722.18 ; 1390,729.86 ccw(c1400.86,729.86) v1@1393.18,722.18 ; P1.6@1393.98,55.63 ccw(c1381.86,67.74) 1399,67.74 ; P1.6@1393.98,55.63 ccw(c1381.86,67.74) 1399,67.74 ; P1.6@1393.98,55.63 ccw(c1381.86,67.74) 1399,67.74 ; v1@1395.82,87.82 cw(c1388.14,80.14) 1399,80.14 ; v1@1395.82,87.82 cw(c1388.14,80.14) 1399,80.14 ; v1@1395.82,87.82 cw(c1388.14,80.14) 1399,80.14 ; 1399,72.76 ccw(c1423.23,72.76) P1.6@1406.1,55.63 ; 1399,72.76 ccw(c1423.23,72.76) P1.6@1406.1,55.63 ; 1399,72.76 ccw(c1423.23,72.76) P1.6@1406.1,55.63 ; 1399,80.14 cw(c1409.86,80.14) v1@1402.18,87.82 ; 1399,80.14 cw(c1409.86,80.14) v1@1402.18,87.82 ; 1399,80.14 cw(c1409.86,80.14) v1@1402.18,87.82
LED2: P1.5 U7.9 | length 954
  Top Layer w12: v1@1431,93 1431,259 1490,318 1490,671 1499,680 v1(1499,714) ; v1@1427.82,94.18 ccw(c1420.14,101.86) 1431,101.86 ; v1@1427.82,94.18 ccw(c1420.14,101.86) 1431,101.86 ; v1@1427.82,94.18 ccw(c1420.14,101.86) 1431,101.86 ; 1431,101.86 ccw(c1441.86,101.86) v1@1434.18,94.18 ; 1431,101.86 ccw(c1441.86,101.86) v1@1434.18,94.18 ; 1431,101.86 ccw(c1441.86,101.86) v1@1434.18,94.18
  Bottom Layer w12: v1@1434,88 1449,73 P1.5@1449,34.57 ; U7.9@1490,760 1490,726 v1@1498,718 ; v1@1431,86.5 cw(c1431,75.64) 1438.68,83.32 ; v1@1431,86.5 cw(c1431,75.64) 1438.68,83.32 ; v1@1431,86.5 cw(c1431,75.64) 1438.68,83.32 ; v1@1435.5,91 ccw(c1446.36,91) 1438.68,83.32 ; v1@1435.5,91 ccw(c1446.36,91) 1438.68,83.32 ; v1@1435.5,91 ccw(c1446.36,91) 1438.68,83.32 ; P1.5@1443.98,55.63 ccw(c1431.86,67.74) 1449,67.74 ; P1.5@1443.98,55.63 ccw(c1431.86,67.74) 1449,67.74 ; P1.5@1443.98,55.63 ccw(c1431.86,67.74) 1449,67.74 ; 1449,72.76 ccw(c1473.23,72.76) P1.5@1456.1,55.63 ; 1449,72.76 ccw(c1473.23,72.76) P1.5@1456.1,55.63 ; 1449,72.76 ccw(c1473.23,72.76) P1.5@1456.1,55.63
  other v1: 1431,91
LED3: P1.7 U7.27 | length 1078.6
  Top Layer w12: v1(1351,90) 1370,109 1370,276 1441,347 1441,582 v1(1428,595) ; v1@1351,94.5 ccw(c1351,105.36) 1358.68,97.68 ; v1@1351,94.5 ccw(c1351,105.36) 1358.68,97.68 ; v1@1351,94.5 ccw(c1351,105.36) 1358.68,97.68 ; v1@1355.5,90 cw(c1366.36,90) 1358.68,97.68 ; v1@1355.5,90 cw(c1366.36,90) 1358.68,97.68 ; v1@1355.5,90 cw(c1366.36,90) 1358.68,97.68 ; v1@1428,590.5 cw(c1428,579.64) 1435.68,587.32 ; v1@1428,590.5 cw(c1428,579.64) 1435.68,587.32 ; v1@1428,590.5 cw(c1428,579.64) 1435.68,587.32 ; v1@1432.5,595 ccw(c1443.36,595) 1435.68,587.32 ; v1@1432.5,595 ccw(c1443.36,595) 1435.68,587.32 ; v1@1432.5,595 ccw(c1443.36,595) 1435.68,587.32
  Bottom Layer w12: U7.27@1315,539.53 1315,581 1329,595 v1(1428,595) ; P1.7@1351,21.57 v1(1351,90) ; P1.7@1343.98,55.63 ccw(c1327.04,72.57) 1351,72.57 ; P1.7@1343.98,55.63 ccw(c1327.04,72.57) 1351,72.57 ; P1.7@1343.98,55.63 ccw(c1327.04,72.57) 1351,72.57 ; v1@1347.82,86.82 cw(c1340.14,79.14) 1351,79.14 ; v1@1347.82,86.82 cw(c1340.14,79.14) 1351,79.14 ; v1@1347.82,86.82 cw(c1340.14,79.14) 1351,79.14 ; 1351,67.93 ccw(c1368.4,67.93) P1.7@1356.1,55.63 ; 1351,67.93 ccw(c1368.4,67.93) P1.7@1356.1,55.63 ; 1351,67.93 ccw(c1368.4,67.93) P1.7@1356.1,55.63 ; 1351,79.14 cw(c1361.86,79.14) v1@1354.18,86.82 ; 1351,79.14 cw(c1361.86,79.14) v1@1354.18,86.82 ; 1351,79.14 cw(c1361.86,79.14) v1@1354.18,86.82 ; 1417.14,595 cw(c1417.14,584.14) v1@1424.82,591.82 ; 1417.14,595 ccw(c1417.14,605.86) v1@1424.82,598.18 ; 1417.14,595 cw(c1417.14,584.14) v1@1424.82,591.82 ; 1417.14,595 ccw(c1417.14,605.86) v1@1424.82,598.18 ; 1417.14,595 ccw(c1417.14,605.86) v1@1424.82,598.18 ; 1417.14,595 cw(c1417.14,584.14) v1@1424.82,591.82
M1_CH1_H: R11.2 R77.2 U3.7 | length 1702.5
  Top Layer w20: U3.7@940,240 1000,240 1009,240 1065,296 1065,333 v2@1065,361 ; 926.5,919.5 926.5,944.09 R77.2@933.78,951.37 933.78,926.79 ; 926.5,919.5 933.78,926.79 ; 926.5,919.5 v1(918,911) 944,911 v1(945,910) 933.78,921.21 933.78,926.79 ; 933.78,926.78 ccw(c951.17,926.78) v1@945.17,910.47 ; 933.78,926.78 ccw(c951.17,926.78) v1@945.17,910.47 ; 933.78,926.78 ccw(c951.17,926.78) v1@945.17,910.47 ; 933.78,926.78 ccw(c951.17,926.78) v1@945.17,910.47 ; v1@917.65,911.35 ccw(c896.27,932.73) 926.5,932.73 cw(c896.27,932.73) v1@917.65,911.35 ; v1@918.29,910.59 cw(c931.13,892.56) 946.78,908.22 ccw(c931.13,892.56) v1@918.29,910.59 ; 926.5,933.48 cw(c951.17,933.48) 933.73,950.92 ccw(c951.17,933.48) 926.5,933.48 ; 933.78,938.28 ccw(c973.28,938.28) 945.35,910.35 cw(c973.28,938.28) 933.78,938.28
  Mid-Layer 2 w20: 922,511 992,441 1065,368 v2@1065,361 ; 1058.2,374.8 cw(c1045.39,362) 1063.5,362 ccw(c1045.39,362) 1058.2,374.8
  Mid-Layer 2 w22: v1(918,911) 944,911 v1(945,910) 945,904 934,893 ; 922,511 v1@922,905 ; 922,845 934,857 934,893 ; 922,881 934,893 ; 934,884.65 cw(c970.35,884.65) 944.65,910.35 ccw(c970.35,884.65) 934,884.65 ; 934,889.75 cw(c959.27,889.75) 944.71,910.41 ccw(c959.27,889.75) 934,889.75
  Bottom Layer w20: 933.78,912.79 R11.2@933.78,948.63 ; R11.2@933.78,948.63 cw(c882.67,948.63) 917.66,911.36 ccw(c882.67,948.63) R11.2@933.78,948.63 ; R11.2@933.78,938.28 ccw(c973.28,938.28) 945.35,910.35 cw(c973.28,938.28) R11.2@933.78,938.28
  Bottom Layer w22: v1(918,911) v1@944,911
  other v2: 1066,362
M1_CH1_L: D9.2 R13.2 U3.5 | length 1170.5
  Top Layer w22: 785,372.5 788.5,372.5 802,359 830,359 ; U3.5@904,340 885,359 830,359 ; U3.5@940,340 849,340 ; 830,359 849,340 ; 849,340 ccw(c849,385.3) 882.37,354.66 cw(c849,385.3) 849,340 ; 829.5,359.5 ccw(c846.01,376.01) 855.2,354.54 cw(c846.01,376.01) 829.5,359.5 ; v1@854.65,354.65 ccw(c890.01,390.01) 890.01,340 cw(c890.01,390.01) v1@854.65,354.65 ; v1@881.65,354.65 ccw(c917.01,390.01) 917.01,340 cw(c917.01,390.01) v1@881.65,354.65 ; v1@882,355.5 cw(c882,339.81) 893.1,350.9 ccw(c882,339.81) v1@882,355.5 ; 896.22,347.78 ccw(c915,366.56) 915,340 cw(c915,366.56) 896.22,347.78
  Bottom Layer w22: v1@872,354 D9.2@872,330 ; D9.2@872,330 882,340 v1(882,355) v1(855,355) 872,338 D9.2@872,330 ; D9.2@872,332.07 cw(c904.93,332.07) v1@881.65,355.35 ; D9.2@872,332.07 cw(c904.93,332.07) v1@881.65,355.35 ; D9.2@872,332.07 cw(c904.93,332.07) v1@881.65,355.35 ; D9.2@872,332.07 cw(c904.93,332.07) v1@881.65,355.35 ; v1@851.5,358.5 ccw(c869.42,376.42) 882.25,354.57 cw(c869.42,376.42) v1@851.5,358.5 ; v1@855.02,355.5 cw(c854.46,337.97) 872,337.97 ccw(c854.46,337.97) v1@855.02,355.5 ; v1@855.27,355.42 cw(c835.56,324.77) 872,324.77 ccw(c835.56,324.77) v1@855.27,355.42 ; 863.78,346.22 cw(c847.57,330) 870.5,330 ccw(c847.57,330) 863.78,346.22 ; D9.2@872,335.28 cw(c897.72,335.28) 881.69,355.39 ccw(c897.72,335.28) D9.2@872,335.28 ; D9.2@875.21,329.29 ccw(c858.81,345.69) 882,345.69 cw(c858.81,345.69) D9.2@875.21,329.29 ; D9.2@879.5,337.5 ccw(c868.58,348.42) 882.45,355.22 cw(c868.58,348.42) D9.2@879.5,337.5
M1_CH2_H: R7.2 R75.2 U2.7 | length 1994
  Top Layer w20: U2.7@549,218 616,218 667,269 v1(667,358) ; R75.2@573.78,951.37 573.78,926.49 ; 573.78,926.49 ccw(c573.78,914.83) 562.15,915.61 cw(c573.78,914.83) 573.78,926.49 ; 573.79,926.49 cw(c573.79,913.72) 586.5,914.95 ccw(c573.79,913.72) 573.79,926.49 ; 573.78,926.49 575.51,926.49 ; 573.78,926.49 562.29,915 v1(587,915) 575.51,926.49 ; 575.51,926.49 ccw(c575.51,912.85) 562.14,915.55 cw(c575.51,912.85) 575.51,926.49 ; v1@561.29,916 ccw(c531.13,946.16) 573.79,946.16 cw(c531.13,946.16) v1@561.29,916 ; v1@561.43,914.14 cw(c574.3,901.27) 586.66,914.63 ccw(c574.3,901.27) v1@561.43,914.14 ; v1@561.97,915.26 cw(c574.3,900.58) 587.86,914.14 ccw(c574.3,900.58) v1@561.97,915.26 ; R75.2@573.79,948.11 ccw(c620.11,948.11) 587.35,915.35 cw(c620.11,948.11) R75.2@573.79,948.11
  Mid-Layer 2 w20: v1@562.29,915 v1(587,915) 587,910 568,891 ; v1@568,911 568,891 ; v1(667,329) v1(667,358) 667,366 667,411 568,510 568,836 568,870 568,891 ; v1@561.29,915.29 cw(c545.1,899.1) 568,899.1 ccw(c545.1,899.1) v1@561.29,915.29 ; 568,884.39 cw(c601.27,884.39) 587.21,914.55 ccw(c601.27,884.39) 568,884.39
  Bottom Layer w20: 573.78,915.21 573.78,931 ; R7.2@573.78,953.63 573.78,931 ; v1@561.55,916.14 ccw(c558.64,931) 573.79,931 ; v1@561.55,916.14 ccw(c558.64,931) 573.79,931 ; v1@561.55,916.14 ccw(c558.64,931) 573.79,931 ; v1@561.55,916.14 ccw(c558.64,931) 573.79,931 ; v1@561.55,916.14 ccw(c558.64,931) 573.79,931 ; v1@561.55,916.14 ccw(c558.64,931) 573.79,931 ; v1@561.55,916.14 ccw(c558.64,931) 573.79,931 ; v1@561.55,916.14 ccw(c558.64,931) 573.79,931 ; 573.79,931 ccw(c589.47,931) v1@587.08,915.49 ; 573.79,931 ccw(c589.47,931) v1@587.08,915.49 ; 573.79,931 ccw(c589.47,931) v1@587.08,915.49 ; 573.79,931 ccw(c589.47,931) v1@587.08,915.49 ; 573.79,931 ccw(c589.47,931) v1@587.08,915.49 ; 573.79,931 ccw(c589.47,931) v1@587.08,915.49 ; 573.78,931 573.78,928.21 v1(587,915) 562.29,915 573.78,926.49 573.78,931 ; v1@561.29,916 ccw(c531.13,946.16) 573.79,946.16 cw(c531.13,946.16) v1@561.29,916 ; v1@561.43,914.14 cw(c574.3,901.27) 586.66,914.63 ccw(c574.3,901.27) v1@561.43,914.14
  other v1: 561.65,915.65
M1_CH2_L: D7.2 R9.2 U2.5 | length 1319.7
  Top Layer w20: R9.2@425,392.5 473.75,343.75 ; 487,331 518,331 v1(536,349) ; v1@530.75,343.75 473.75,343.75 ; U2.5@536,324 v1(536,349) ; U2.5@541,319 498.5,319 473.75,343.75 ; U2.5@550,319 550,349 ; v1@564,349 550,349 ; U2.5@565,325 v1(565,348) ; v1(536,349) ccw(c563.04,321.96) 524.99,318.1 cw(c563.04,321.96) v1(536,349) ; v1(536,349) cw(c493.54,349) 523.3,318.71 ccw(c493.54,349) v1(536,349) ; v1(536,349) 550,349 ; 490.2,331 cw(c490.2,284.2) 523.29,317.29 ccw(c490.2,284.2) 490.2,331 ; 522.12,343.75 ccw(c522.12,362.88) 535.65,349.35 cw(c522.12,362.88) 522.12,343.75 ; v1@535.66,348.63 cw(c505.46,315.9) 550,315.9 ccw(c505.46,315.9) v1@535.66,348.63 ; U2.5@550,315.35 cw(c591.63,315.35) 565.32,347.61 ccw(c591.63,315.35) U2.5@550,315.35 ; v1@565,342.14 ccw(c598.14,342.14) 574.71,318.71 cw(c598.14,342.14) v1@565,342.14
  Bottom Layer w20: D7.2@527,297.83 D7.2@527,311.5 ; D7.2@527.83,297.83 543.5,313.5 ; 543.5,341.5 543.5,328 ; 552,327 552,349 ; v1@564,349 552,349 ; v1(565,348) 565,335 543.5,313.5 ; D7.2@525.39,299.74 cw(c549.89,299.74) 532.57,317.07 ; D7.2@525.39,299.74 cw(c549.89,299.74) 532.57,317.07 ; D7.2@525.39,299.74 cw(c549.89,299.74) 532.57,317.07 ; D7.2@525.39,299.74 cw(c549.89,299.74) 532.57,317.07 ; D7.2@527,311.5 536,320.5 v1(536,349) 552,349 ; D7.2@527,311.5 543.5,328 ; 543.5,313.5 543.5,328 ; v1@535.65,348.65 cw(c516.69,329.69) 543.5,329.69 ccw(c516.69,329.69) v1@535.65,348.65 ; v1@535.77,348.56 cw(c521.83,321.8) 552,321.8 ccw(c521.83,321.8) v1@535.77,348.56 ; 552,323.3 cw(c580.84,323.3) 565.27,347.58 ccw(c580.84,323.3) 552,323.3 ; 554.95,324.95 ccw(c531.91,348) 564.5,348 cw(c531.91,348) 554.95,324.95
M1_CH3_H: R3.2 R73.2 U1.7 | length 2089.4
  Top Layer w20: U1.7@160,240 216,240 233,240 v1(285,292) ; 210,926 210,921 221,910 ; R73.2@210,937.59 v1(210,910) ; R73.2@213.78,941.37 213.78,917.21 221,910 ; v1(210,910) 221,910 ; v1(210,910) 225,895 v1(236,895) 221,910 ; v1@210.1,909.51 cw(c213.59,891.59) 226.5,904.5 ; v1@210.1,909.51 cw(c213.59,891.59) 226.5,904.5 ; v1@210.1,909.51 cw(c213.59,891.59) 226.5,904.5 ; v1@210.1,909.51 cw(c213.59,891.59) 226.5,904.5 ; v1@210.1,909.51 cw(c213.59,891.59) 226.5,904.5 ; v1@210.1,909.51 cw(c213.59,891.59) 226.5,904.5 ; v1@209.65,910.35 ccw(c199.66,920.34) 213.78,920.34 cw(c199.66,920.34) v1@209.65,910.35 ; v1@210,909.5 cw(c210,881.74) 229.63,901.37 ccw(c210,881.74) v1@210,909.5 ; v1@216.37,903.63 ccw(c236,923.26) 236,895.5 cw(c236,923.26) v1@216.37,903.63
  Mid-Layer 2 w20: 224,882 236,894 v1(236,895) ; v1(265,272) 310,317 310,743 262,791 224,829 224,895 ; 224,895 224,896 v1(210,910) 222,910 236,896 v1(236,895) ; 224,895 v1(236,895) ; v1@209.85,909.52 cw(c203.73,890.2) 224,890.2 ccw(c203.73,890.2) v1@209.85,909.52 ; v1@209.83,909.53 cw(c202.73,889.48) 224,889.48 ccw(c202.73,889.48) v1@209.83,909.53 ; v1@210,909.5 cw(c210,879.32) 231.34,900.66 ccw(c210,879.32) v1@210,909.5 ; v1@210.09,909.51 cw(c213.84,889.85) 228,904 ccw(c213.84,889.85) v1@210.09,909.51 ; v1@216.37,903.63 ccw(c236,923.26) 236,895.5 cw(c236,923.26) v1@216.37,903.63 ; 224,864.82 cw(c266.18,864.82) 236.35,894.65 ccw(c266.18,864.82) 224,864.82
  Bottom Layer w20: R3.2@248.63,948.63 v1(210,910) ; R3.2@253.78,948.63 240.58,935.42 240.58,925.42 ; v1(210,910) cw(c210,880.95) 235.56,894.76 ccw(c210,880.95) v1(210,910) ; v1(210,910) 225,895 v1(236,895) ; v1(210,910) 225.16,910 232.08,916.92 ; 232.08,916.92 cw(c215.21,933.79) 210.11,910.49 ccw(c215.21,933.79) 232.08,916.92 ; 232.08,916.92 240.58,925.42 ; 232.08,916.92 232.08,898.92 v1(236,895) ; v1(236,895) 240.58,899.58 240.58,925.42 ; v1@216.37,903.63 ccw(c236,923.26) 236,895.5 cw(c236,923.26) v1@216.37,903.63 ; 232.08,905.68 ccw(c246.68,905.68) 236.35,895.35 cw(c246.68,905.68) 232.08,905.68 ; v1@235.65,895.35 ccw(c223.74,907.26) 240.58,907.26 cw(c223.74,907.26) v1@235.65,895.35 ; 240.58,922.17 cw(c272.86,922.17) 253.65,948.12 ccw(c272.86,922.17) 240.58,922.17 ; 240.58,930.31 cw(c259.21,930.31) 253.47,948.03 ccw(c259.21,930.31) 240.58,930.31